# Altium PCB PCB1.PcbDoc (part 2 of 3)
Units mm, origin at the board's own origin, x right, y up, seen from the top; angles counter-clockwise.
Board outline 93.85 x 63.5 mm, 4 copper layers (Top Layer, Mid Layer 1, Mid Layer 2, Bottom Layer), stack 1.65 mm thick; 77 components, 56 nets, 298 pads, 141 vias.
Unrouted connection lines stored in the file: 1.
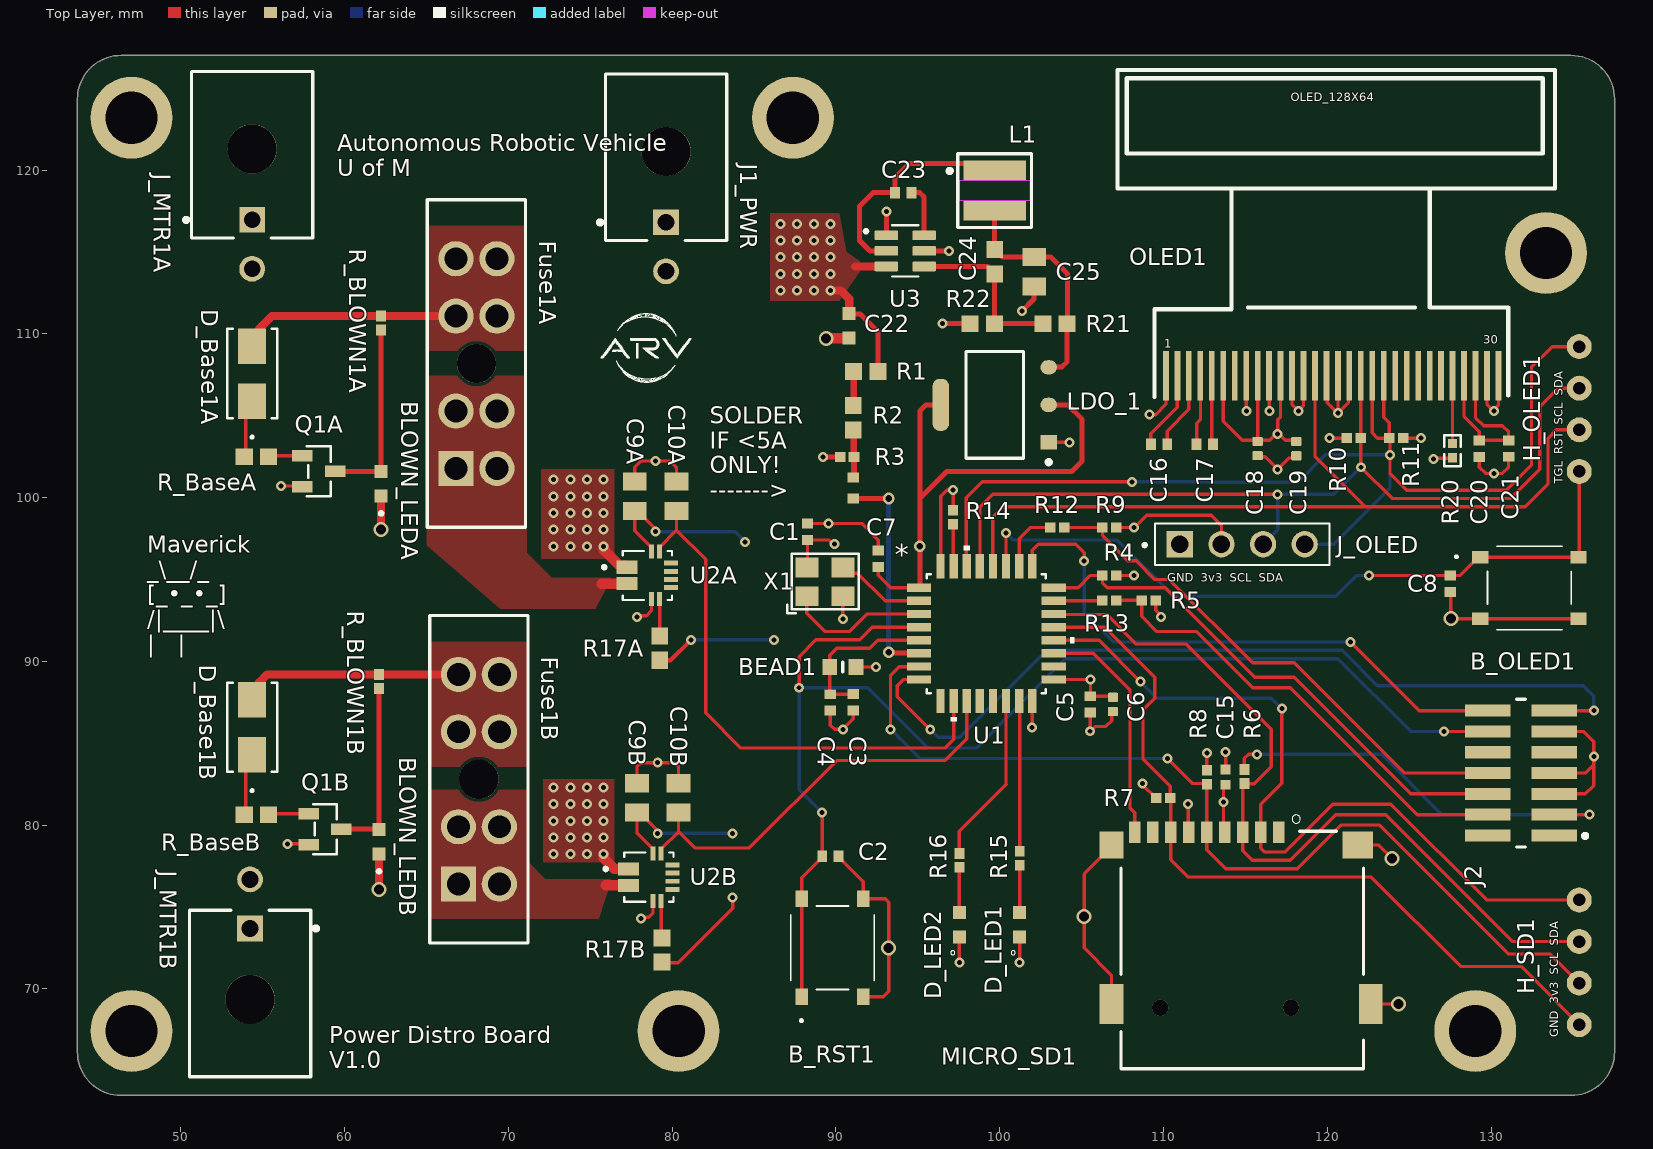
[diagram p0: Top Layer view]

## Part data (continued)
R4 R5 R6 R7 R8 R9 R10 R11 R14: "Resistor, 10kΩ, ±1%, 62.5mW, 50V, ±100ppm/℃, -55℃~+155℃, SMD 0402", JLCPCB Basic Part=Yes, JLCPCB Part Number=C25744, Manufacturer=Uniroyal, Package Size=0402, Power Rating=62.5mW, Resistance=10kΩ, Temperature Coefficient=±100ppm/℃, Temperature Rating=-55℃~+155℃, Tolerance=±1%, Voltage Rating=50V, Category=Resistors, ComponentLink1Description=Datasheet, ComponentLink1URL=https://wmsc.lcsc.com/wmsc/upload/file/pdf/v2/lcsc/2206010100_UNI-ROYAL-Uniroyal-Elec-0402WGF1002TCE_C25744.pdf, ComponentLink2Description="JLCPCB Part URL", ComponentLink2URL=https://jlcpcb.com/partdetail/C25744, Manufacturer Part Number=0402WGF1002TCE, Supplier 1=LCSC, Supplier Part Number 1=C25744
R12 R13: "Resistor, 22Ω, ±1%, 62.5mW, 50V, ±200ppm/℃, -55℃~+155℃, SMD 0402", JLCPCB Basic Part=Yes, JLCPCB Part Number=C25092, Manufacturer=Uniroyal, Package Size=0402, Power Rating=62.5mW, Resistance=22Ω, Temperature Coefficient=±200ppm/℃, Temperature Rating=-55℃~+155℃, Tolerance=±1%, Voltage Rating=50V, Category=Resistors, ComponentLink1Description=Datasheet, ComponentLink1URL=https://wmsc.lcsc.com/wmsc/upload/file/pdf/v2/lcsc/2205311900_UNI-ROYAL-Uniroyal-Elec-0402WGF220JTCE_C25092.pdf, ComponentLink2Description="JLCPCB Part URL", ComponentLink2URL=https://jlcpcb.com/partdetail/C25092, Manufacturer Part Number=0402WGF220JTCE, Supplier 1=LCSC, Supplier Part Number 1=C25092
R15 R16: "Resistor, 100Ω, ±1%, 62.5mW, 50V, ±200ppm/℃, -55℃~+155℃, SMD 0402", JLCPCB Basic Part=Yes, JLCPCB Part Number=C25076, Manufacturer=Uniroyal, Package Size=0402, Power Rating=62.5mW, Resistance=100Ω, Temperature Coefficient=±200ppm/℃, Temperature Rating=-55℃~+155℃, Tolerance=±1%, Voltage Rating=50V, Category=Resistors, ComponentLink1Description=Datasheet, ComponentLink1URL=https://wmsc.lcsc.com/wmsc/upload/file/pdf/v2/lcsc/2205311900_UNI-ROYAL-Uniroyal-Elec-0402WGF1000TCE_C25076.pdf, ComponentLink2Description="JLCPCB Part URL", ComponentLink2URL=https://jlcpcb.com/partdetail/C25076, Manufacturer Part Number=0402WGF1000TCE, Supplier 1=LCSC, Supplier Part Number 1=C25076